# Altium PCB PCB1.PcbDoc
Units mm, origin at the board's own origin, x right, y up, seen from the top; angles counter-clockwise.
Board outline 145.8 x 123.7 mm, 2 copper layers (Top Layer, Bottom Layer); 35 components, 39 nets, 130 pads, 24 vias.
Unrouted connection lines stored in the file: 28.
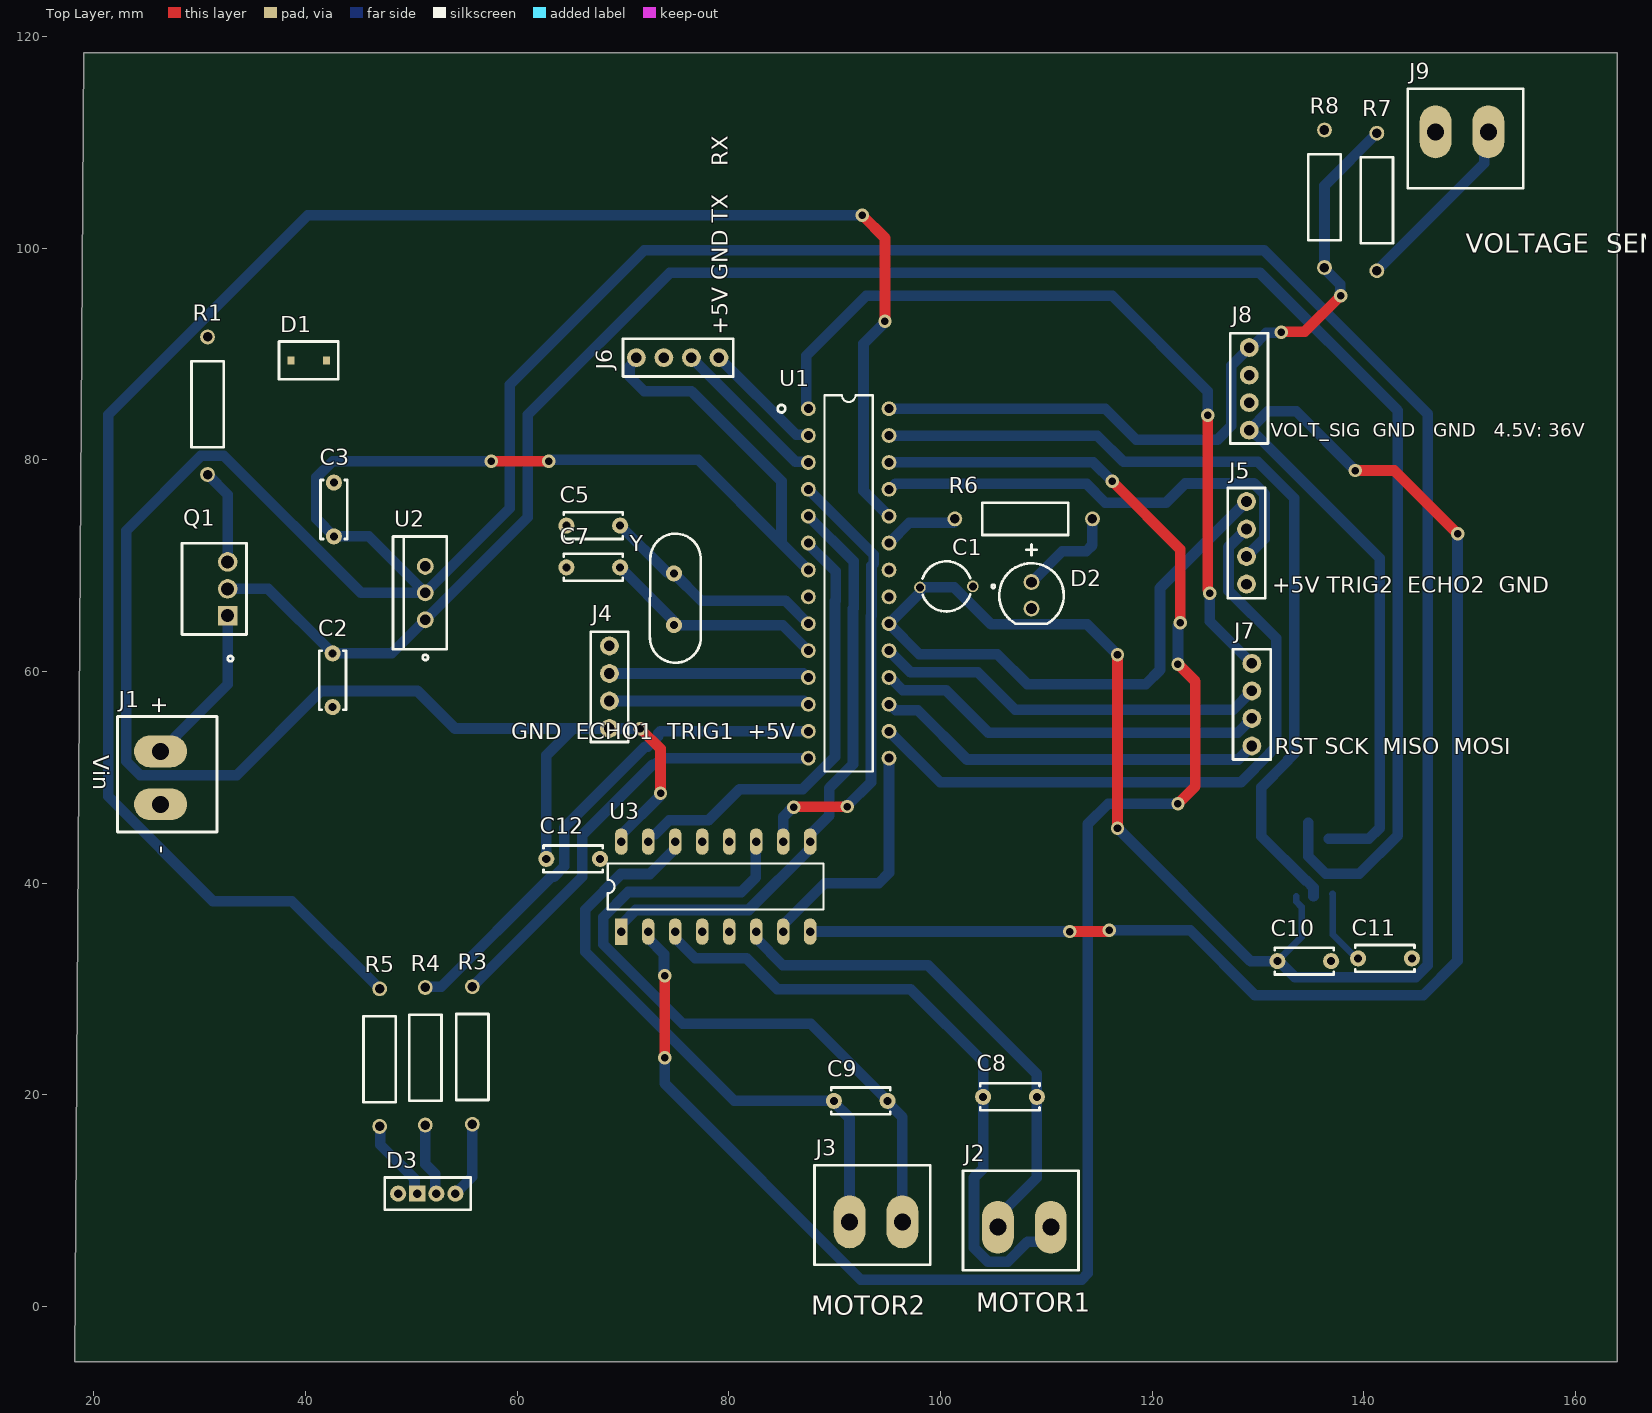
[diagram p0: Top Layer view]
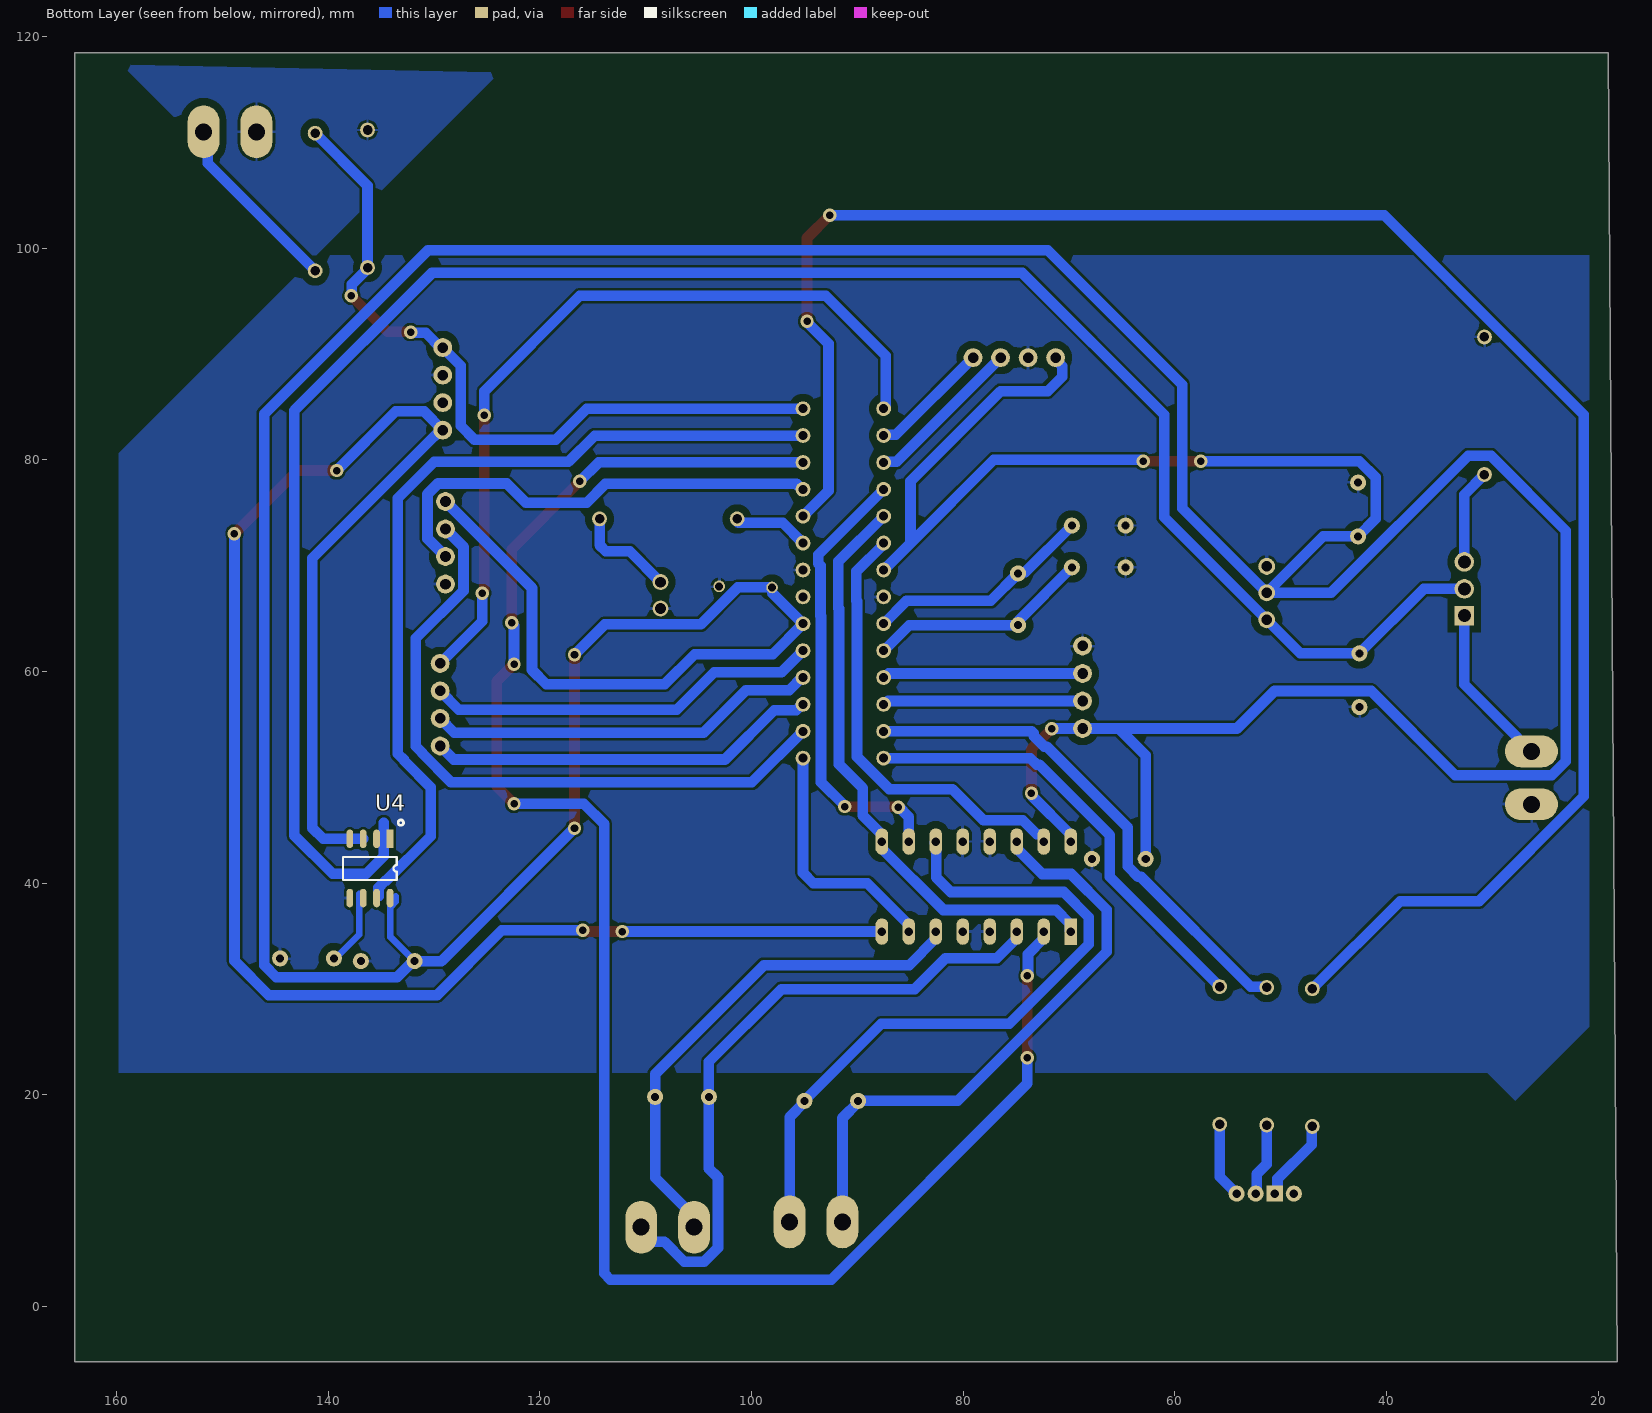
[diagram p1: Bottom Layer view, seen from below]
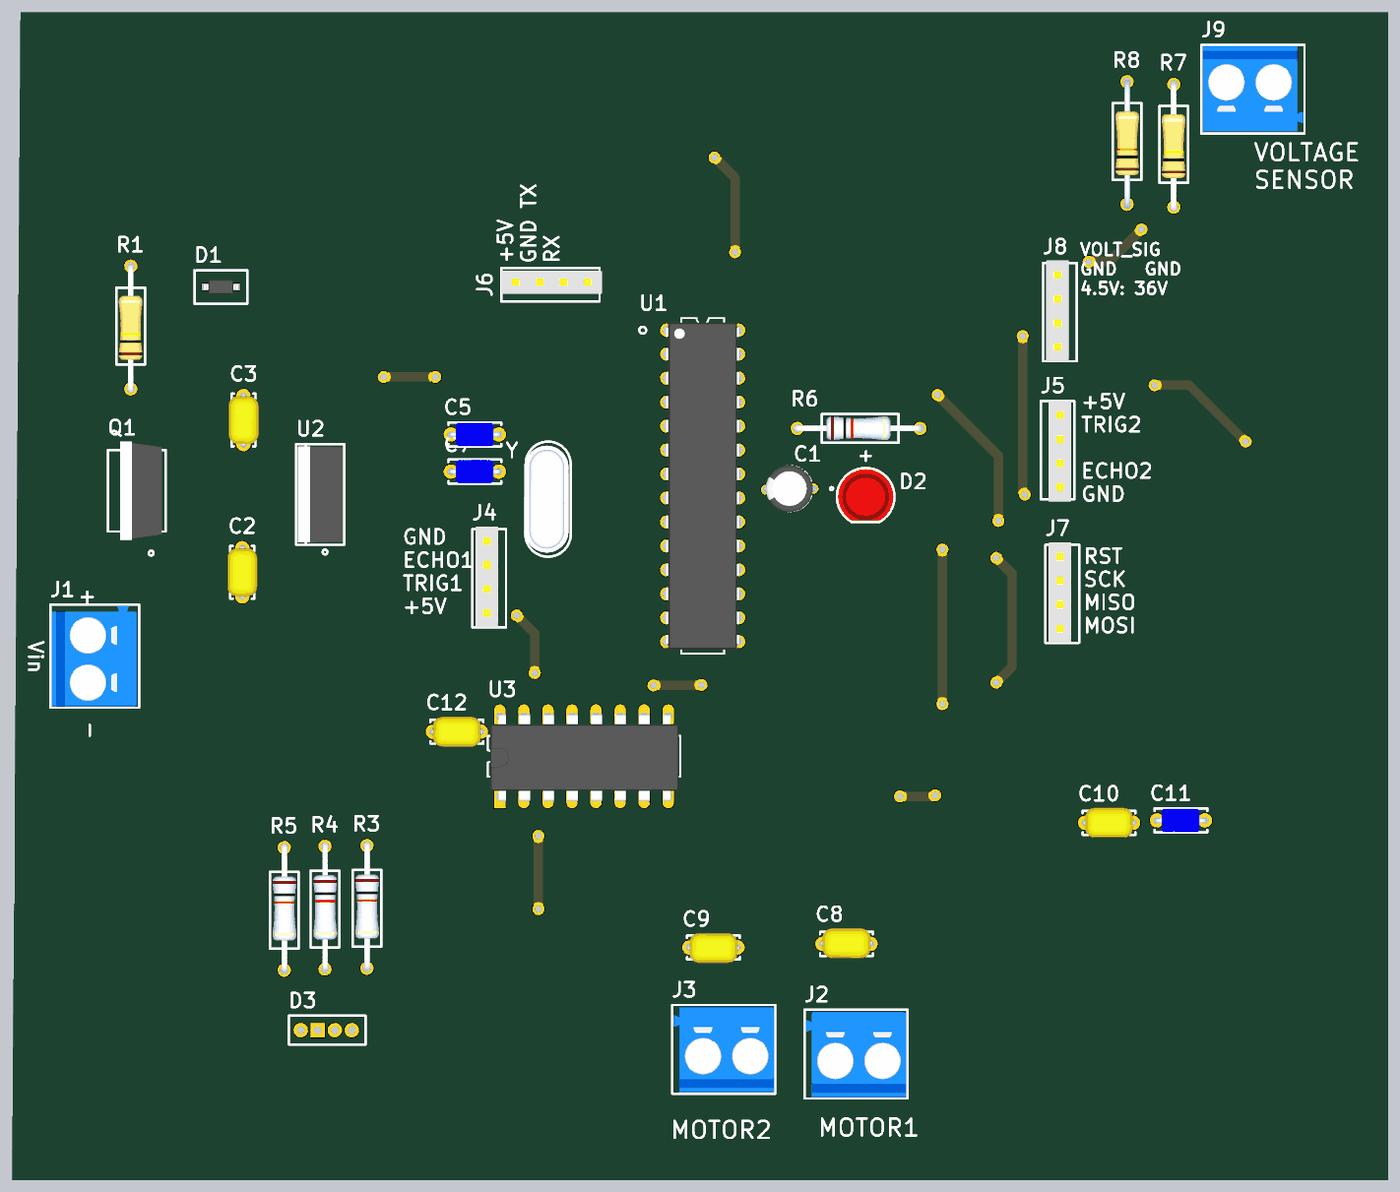
[diagram p2: 3D render of the assembled board from above, using the file's embedded part models]

## Layer stack, top to bottom
Top Solder: solder mask 0.0102, Solder Resist, Dk 3.5
Top Layer: signal copper 0.0356
Dielectric 1: dielectric 0.32, FR-4, Dk 4.8
Bottom Layer: signal copper 0.0356
Bottom Solder: solder mask 0.0102, Solder Resist, Dk 3.5

## Board outline
18.161,-5.207 19.05,118.491 163.957,118.491 163.957,-5.207

## Design rules (kind name [scope] priority, off if disabled: settings)
Clearance [All] p1: gap=0.254 ignorepadtopadclearanceinfootprint=FALSE except(0.7: Arc-Arc Arc-Track Track-Track THPad-Fill THPad-Poly THPad-Region)
PolygonConnect [All] p1: connectstyle=Relief reliefconductorwidth=0.254 reliefentries=4 polygonreliefangle="90 Angle" airgapwidth=0.254
RoutingVias [All] p1: holewidth=0.711 width=1.27 viastyle="Through Hole" minholewidth=0.711 minwidth=1.27 maxholewidth=0.711 maxwidth=1.27
SolderMaskExpansion [All] p1: expansion=0.102 istentingtop=FALSE
SupplyNets "Schematic Supply Nets_5" [InNet('Vin')] p1: voltage=0.000
SupplyNets "Schematic Supply Nets_4" [InNet('VCC')] p2: voltage=0.000
SupplyNets "Schematic Supply Nets_3" [InNet('+4.5V : 36V')] p3: voltage=0.000
SupplyNets "Schematic Supply Nets_2" [InNet('+5V')] p4: voltage=0.000
SupplyNets "Schematic Supply Nets" [InNet('GND')] p5: voltage=0.000
Width [All] p1: maxlimit=1.27 minlimit=0.635 preferedwidth=1 minimp=50.000000 maximp=50.000000 favimp=50.000000
30 further rules are at their usual default settings.

## Components (designator, comment, footprint, x,y, rotation, side; value= is the part's Value field where it differs from the comment)
C1 "CAP 10uF" "Cap 10uF" 103.044,68.047 r180 top
C2 "Cap 0.1uF" "CAP 0.1uF" 42.545,56.642 r90 top
C3 "Cap 0.1uF" "CAP 0.1uF" 42.672,77.851 r270 top
C5 "CAP 22pF" "Cap 22pF" 64.643,73.787 r0 top
C7 "CAP 22pF" "Cap 22pF" 64.643,69.85 r0 top
C8 "CAP 30pF" "CAP 30pF" 109.093,19.812 r180 top
C9 "CAP 30pF" "CAP 30pF" 89.916,19.431 r0 top
C10 "Cap 0.1uF" "CAP 0.1uF" 136.906,32.639 r180 top
C11 "CAP 1nF" "CAP 1nF" 144.526,32.893 r180 top
C12 "Cap 0.1uF" "CAP 0.1uF" 67.818,42.291 r180 top
D1 "1N5819 SMD Diode" "1N5819 SMD Diode" 38.608,89.408 r0 top
D2 "LED" LED 108.585,68.453 r270 top
D3 "RGB LED" "RGB LED" 48.746,10.668 r0 top
J1 "TerminalBlock 2pin" "Terminal Block 2pin" 17.145,51.689 r270 top
J2 "TerminalBlock 2pin" "Terminal Block 2pin" 106.172,-1.651 r0 top
J3 "TerminalBlock 2pin" "Terminal Block 2pin" 92.155,-1.143 r0 top
J4 "Headers 4pin" "Header 4pin" 68.707,54.592 r90 top
J5 "Headers 4pin" "Header 4pin" 128.905,76.091 r270 top
J6 "Headers 4pin" "Header 4pin" 71.229,89.662 r0 top
J7 "Headers 4pin" "Header 4pin" 129.413,52.941 r90 top
J8 "VOLTAGE SENSOR" "Header 4pin" 129.159,82.786 r90 top
J9 "TerminalBlock 2pin" "Terminal Block 2pin" 151.003,120.142 r180 top
Q1 "IRF5305 P-MOSFET" IRF5305 32.766,65.278 r90 top
R1 "RES 100K" Res100K 30.734,91.613 r270 top
R3 "RES 1K" "Res 1K" 55.753,17.226 r90 top
R4 "RES 1K" "Res 1K" 51.308,17.145 r90 top
R5 "RES 1K" "Res 1K" 46.99,17.018 r90 top
R6 "RES 1K" "Res 1K" 114.346,74.422 r180 top
R7 "RES 30K" Res100K 141.224,110.871 r270 top
R8 "RES 10K" Res10K 136.271,111.171 r270 top
U1 "Atmega328p" "ATMega 328 P-PU - duplicate" 87.503,51.816 r0 top
U2 "LM7805" LM7805 51.308,64.887 r90 top
U3 "L293D" L293D 72.36,38.227 r90 top
U4 "CURRENT_SEN ACS712" Cuurent_sens 134.139,44.196 r270 bottom
Y "Crystal oscillator" "Crrystal 16MHZ" 74.803,64.389 r90 top

## Footprints (in the part's own frame and the unit in brackets; to place one, negate y for a bottom-side part, rotate by r counter-clockwise, add the part's x,y. Pads: shape width x height; smd on the part's side, far side on the other; paste and mask are expansions set on the pad)
"1N5819 SMD Diode" [mm]
  rect 0.65x0.75 smd: A(0,0) K(3.35,0)
  silkscreen extent -1.12,-1.78 4.47,1.78, body extent -0.15,-0.77 3.5,0.77, height 1.5
"ATMega 328 P-PU - duplicate" [mm]
  round 1.4 hole 0.85: 1(0,33.02) 2(0,30.48) 3(0,27.94) 4(0,25.4) 5(0,22.86) 6(0,20.32) 7(0,17.78) 8(0,15.24) 9(0,12.7) 10(0,10.16) 11(0,7.62) 12(0,5.08) 13(0,2.54) 14(0,0) 15(7.62,0) 16(7.62,2.54) 17(7.62,5.08) 18(7.62,7.62) 19(7.62,10.16) 20(7.62,12.7) 21(7.62,15.24) 22(7.62,17.78) 23(7.62,20.32) 24(7.62,22.86) 25(7.62,25.4) 26(7.62,27.94) 27(7.62,30.48) 28(7.62,33.02)
  silkscreen extent -2.9,-1.27 6.09,34.29, body extent -0.14,-0.83 7.76,33.85, height 4.57
"CAP 0.1uF" [mil]
  round 60 hole 30: 1(0,0) 2(200,0)
  silkscreen extent -10,-50 210,50, body extent -10,-62 210,63, height 231
"CAP 1nF" [mil]
  round 60 hole 30: 1(0,0) 2(200,0)
  silkscreen extent -10,-50 210,50, body extent -7,-48 210,50, height 217
"Cap 10uF" [mm]
  round 1.1 hole 0.75: 1(0,0) 2(5,0.102)
  silkscreen extent -2.08,-2.37 4.75,2.37, body extent -0.21,-2.5 5.29,2.5, height 12.5
"Cap 22pF" [mil]
  round 60 hole 30: 1(0,0) 2(200,0)
  silkscreen extent -10,-50 210,50, body extent -8,-49 208,49, height 217
"CAP 30pF" [mil]
  round 60 hole 30: 1(0,0) 2(200,0)
  silkscreen extent -10,-50 210,50, body extent -10,-65 210,60, height 231
"Crrystal 16MHZ" [mil]
  round 60 hole 28.74: 1(0,0) 2(192.13,0)
  silkscreen extent -140,-100 340,90, body extent -123,-92 323,92, height 256
Cuurent_sens [mm]
  rect 1.75x0.65 smd: 1(0,0)
  oval 1.75x0.65 smd: 2(0,-1.27) 3(0,-2.54) 4(0,-3.81) 5(5.6,-3.81) 6(5.6,-2.54) 7(5.6,-1.27) 8(5.6,0)
  silkscreen extent -1.78,-4.45 3.89,1.27, body extent -0.21,-4.48 5.79,0.42, height 1.75
"Header 4pin" [mil]
  round 70 hole 39.37: 1(1,0) 2(103.36,0) 3(205.72,0) 4(308.09,0)
  silkscreen extent -49,-70 361,70, body extent -49,-38 371,58, height 335
IRF5305 [mm]
  rect 1.845x1.845 hole 1.23: 1(0,0.127)
  round 1.845 hole 1.23: 2(2.54,0.127) 3(5.08,0.127)
  silkscreen extent -4.32,-1.65 6.86,4.45, body extent -2.67,-1.27 7.75,3.18, height 19.3
L293D [mm]
  rect 2.5x1.2 hole 0.8: 1(-2.794,2.54)
  oval 2.5x1.2 hole 0.8: 2(-2.794,-0.01) 3(-2.794,-2.56) 4(-2.794,-5.11) 5(-2.794,-7.66) 6(-2.794,-10.21) 7(-2.794,-12.76) 8(-2.794,-15.31) 9(5.706,-15.31) 10(5.706,-12.76) 11(5.706,-10.21) 12(5.706,-7.66) 13(5.706,-5.11) 14(5.706,-2.56) 15(5.706,-0.01) 16(5.706,2.54)
  silkscreen extent -0.71,-16.58 3.62,3.81, body extent -3.3,-16.44 5.94,3.56, height 5.1
LED [mm]
  round 1.5 hole 1: 1(0,0) 2(2.5,0)
  silkscreen extent -3.56,-3.05 3.95,3.05, body extent -1.66,-2.95 3.77,2.95, height 10.6
LM7805 [mm]
  round 1.6 hole 1: 1(0,0) 2(2.55,0) 3(5.05,0)
  silkscreen extent -3.81,-2.03 7.87,3.05, body extent -2.54,-1.84 7.62,2.86, height 19.81
Res10K [mm]
  round 1.4 hole 0.9: 1(0,0) 2(13,0)
  silkscreen extent 2.29,-1.52 10.41,1.52, body extent -0.2,-1.23 13.4,1.27, height 4.04
Res100K [mm]
  round 1.4 hole 0.9: 1(0,0) 2(13,0)
  silkscreen extent 2.29,-1.52 10.41,1.52, body extent -0.2,-1.27 13.4,1.23, height 4.04
"Res 1K" [mm]
  round 1.4 hole 0.9: 1(0,0) 2(13,0)
  silkscreen extent 2.29,-1.52 10.41,1.52, body extent -0.2,-1.27 13.4,1.23, height 4.04
"RGB LED" [mil]
  round 60 hole 31.5: 1(0,0) 3(141.73,0) 4(212.6,0)
  rect 60x60 hole 31.5: 2(70.87,0)
  silkscreen extent -50,-60 270,60
"Terminal Block 2pin" [mm]
  oval 3x5 hole 1.6: 1(-0.762,9.144) 2(4.238,9.144)
  silkscreen extent -4.06,5.08 6.86,14.48, body extent -3.9,5.22 6.7,14.22, height 12.6

## Part data
J8: library part "Headers 4pin"
R7: library part "RES 100K"
U4: library part "CURRENT_MOD ACS712"

## Via types
v1: diameter 1.27, hole 0.711, Top Layer to Bottom Layer, 24 vias

## Nets (pads, with @x,y where several pads share a name; then routed paths per layer and width w, separated by ;. In a path a pad name is that pad's centre, name@x,y a point inside that pad or via, vN(x,y) a via of type N, cw(c..) or ccw(c..) an arc to the next point about the centre after c; other vN are vias at no path point)
"+4.5V : 36V": J8.1 U3.8 U4.3 U4.4 | length 178.7
  Top Layer w1: v1(112.219,35.433) 115.751,35.433 115.878,35.56 v1(115.951,35.56) ; v1(139.192,78.994) 142.875,78.994 v1(148.844,73.025)
  Bottom Layer w1: U3.8 v1(112.219,35.433) ; v1(115.951,35.56) 123.571,35.56 129.708,29.423 145.604,29.423 148.844,32.663 v1(148.844,73.025) ; U4.3 U4.4 140.462,44.196 141.478,45.212 141.478,70.705 130.664,81.519 130.661,81.519 129.37,82.811 J8.1 130.93,84.582 133.604,84.582 v1(139.192,78.994)
+5V: C1.2 C3.2 C10.2 C12.2 J4.1 J5.1 J6.1 U1.7 U1.20 U2.2 U3.16 U4.8 | length 539.6
  Top Layer w1: v1(57.531,79.883) v1(62.992,79.883) ; v1(71.628,54.61) 73.533,52.705 v1(73.533,48.514) ; v1(116.713,45.212) v1(116.713,61.595)
  Bottom Layer w0.635: C10.2 134.112,34.925 134.112,37.747 133.604,38.255 133.604,38.735
  Bottom Layer w1: v1(57.531,79.883) 42.56,79.883 41.021,78.344 41.021,74.422 C3.2 45.974,72.771 U2.2 ; C12.2 62.738,52.07 65.285,54.617 ; v1(62.992,79.883) 63.119,79.883 63.246,80.01 77.089,80.01 84.963,72.136 ; U3.16 69.82,44.583 73.481,48.244 73.481,48.462 v1(73.533,48.514) ; J6.1 71.254,89.451 70.637,88.835 70.637,87.859 72.009,86.487 76.454,86.487 84.963,77.978 84.963,72.136 ; v1(71.628,54.61) 71.624,54.614 68.711,54.614 J4.1 65.285,54.617 ; U1.7 84.963,72.136 ; C1.2@98.025,67.418 U1.20 97.995,61.644 105.361,61.644 108.204,58.801 119.38,58.801 120.728,60.149 120.728,67.889 J5.1 ; C1.2 101.301,67.945 104.797,64.449 113.859,64.449 v1(116.713,61.595) ; v1(116.713,45.212) 129.286,32.639 C10.2 131.968,32.639 133.484,31.123 144.9,31.123 146.042,32.265 146.042,84.336 130.556,99.822 72.009,99.822 59.295,87.108 59.295,75.424 U2.2 ; U2.2 45.231,67.437 32.279,80.39 30.106,80.39 23.035,73.318 23.035,51.517 24.355,50.197 33.482,50.197 41.443,58.158 50.57,58.158 54.111,54.617 65.285,54.617
BLUE: R3.2 U1.14 | length 43
  Bottom Layer w1: R3.2 66.138,40.611 66.138,44.548 72.8,51.21 73.036,51.21 73.642,51.816 U1.14
CUR_SIG: U1.27 U4.7 | length 81.7
  Bottom Layer w1: U1.27 114.808,82.296 117.285,79.819 129.96,79.819 133.399,76.38 133.399,52.224 132.813,51.638 132.813,51.558 130.302,49.047 130.302,44.45 134.527,40.225 134.586,40.225 135.234,39.577 U4.7@135.234,38.771
ECHO1: J4.3 U1.11 | length 19
  Bottom Layer w1: J4.3 87.014,59.817 87.395,59.436 U1.11
ECHO2: J5.3 U1.25 | length 44.2
  Bottom Layer w1: U1.25 95.231,77.216 95.739,77.724 113.792,77.724 115.57,75.946 121.294,75.946 123.114,77.766 129.609,77.766 130.605,76.77 130.605,72.566 J5.3
EN: U1.5 U3.1 U3.9 | length 56.3
  Bottom Layer w1: U3.1 69.92,35.533 69.92,36.183 71.202,37.465 81.852,37.465 87.67,43.283 87.67,44.529 87.735,44.594 87.735,44.648 89.486,46.399 89.486,48.991 91.723,51.228 91.723,65.924 91.772,65.973 91.772,70.407 U1.5
GND: C1.1 C2.1 C3.1 C5.1 C7.1 C10.1 C11.1 C12.1 D2.2 D3.1 J1.2 J4.4 J5.4 J6.2 J8.2 J8.3 J9.2 R1.1 R8.1 U1.8 U1.22 U2.3 U3.4 U3.5 U3.12 U3.13 U4.5
GREEN: R4.2 U1.13 | length 48.5
  Bottom Layer w1: R4.2 51.385,30.222 52.812,30.222 63.182,40.591 63.442,40.591 64.438,41.587 64.438,45.261 72.087,52.91 72.332,52.91 73.328,53.906 73.328,54.151 73.533,54.356 U1.13
IN1: U1.26 U3.2 | length 171.1
  Top Layer w1: v1(73.914,23.495) v1(73.914,31.242) ; v1(116.205,77.978) 122.648,71.535 v1(122.648,64.618) ; v1(122.428,47.498) 124.079,49.149 124.079,59.055 v1(122.428,60.706)
  Bottom Layer w1: U3.2 72.37,34.783 73.862,33.291 73.862,31.294 v1(73.914,31.242) ; v1(73.914,23.495) 73.914,21.082 92.456,2.54 103.771,2.54 103.772,2.539 107.048,2.539 107.049,2.54 113.333,2.54 113.919,3.126 113.919,45.593 115.824,47.498 v1(122.428,47.498) ; U1.26 114.427,79.756 v1(116.205,77.978) ; v1(122.428,60.706) 122.428,64.325 122.648,64.545 v1(122.648,64.618)
IN2: U1.15 U3.7 | length 23.5
  Bottom Layer w1: U3.7 85.12,36.083 89.042,40.005 94.156,40.005 95.123,40.972 U1.15
IN3: U1.4 U3.10 | length 42.4
  Top Layer w1: v1(86.106,47.195) 86.131,47.219 91.161,47.219 v1(91.186,47.244)
  Bottom Layer w1: U3.10 85.12,46.258 86.057,47.195 v1(86.106,47.195) ; U1.4 93.681,71.038 93.681,70.21 93.472,70.001 93.472,65.269 93.423,65.22 93.423,49.554 91.186,47.317 v1(91.186,47.244)
IN4: U1.6 U3.15 | length 42.6
  Bottom Layer w1: U3.15 72.37,44.529 72.462,44.621 73.043,44.621 74.359,45.937 78.068,45.937 81.026,48.895 86.986,48.895 90.023,51.932 90.023,66.628 90.072,66.677 90.072,69.459 87.503,72.028 U1.6
LED_ind: R6.2 U1.23 | length 7.3
  Bottom Layer w1: U1.23 97.028,74.041 101.219,74.041 101.346,74.168 R6.2
MISO: J7.2 U1.18 | length 37
  Bottom Layer w1: U1.18 95.231,59.436 96.423,58.244 100.506,58.244 104.521,54.229 128.076,54.229 J7.2
MOSI: J7.1 U1.17 | length 37
  Bottom Layer w1: U1.17 95.231,56.896 95.772,56.355 97.823,56.355 102.489,51.689 128.136,51.689 J7.1
NetC5_2: C5.2 U1.9 Y.2 | length 20.9
  Bottom Layer w1: C5.2 Y.2@74.141,69.369 ; Y.2 77.397,66.675 85.344,66.675 U1.9
NetC7_2: C7.2 U1.10 Y.1 | length 21.3
  Bottom Layer w1: C7.2 74.703,64.87 74.703,64.489 Y.1 85.09,64.389 U1.10
NetC11_2: C11.2 U4.6 | length 7.2
  Bottom Layer w0.635: 137.033,38.989 137.052,38.97 137.052,35.16 139.319,32.893 C11.2
NetD1_1: Q1.3 R1.2 | length 9.2
  Bottom Layer w1: R1.2@30.811,78.69 R1.2 32.639,76.708 Q1.3
NetD2_1: D2.1 R6.1 | length 9.7
  Bottom Layer w1: D2.1 111.506,71.374 113.76,71.374 114.346,71.96 R6.1
NetD3_2: D3.2 R5.1 | length 7.8
  Bottom Layer w1: R5.1 47.067,16.941 47.067,15.299 50.284,12.082 50.284,10.93 D3.2
NetD3_3: D3.3 R4.1 | length 6.9
  Bottom Layer w1: R4.1 51.308,13.462 52.246,12.524 52.246,10.768 D3.3
NetD3_4: D3.4 R3.1 | length 7.2
  Bottom Layer w1: D3.4 55.753,12.275 R3.1
NetJ9_1: J9.1 R7.2 | length 17.5
  Bottom Layer w1: R7.2 151.382,108.029 151.382,110.615 J9.1
OUT1: C8.2 J2.2 U3.3 | length 61.9
  Bottom Layer w1: U3.3 74.92,34.783 76.81,32.893 81.661,32.893 84.582,29.972 97.155,29.972 104.013,23.114 C8.2 104.013,13.043 103.156,12.186 103.156,5.559 104.476,4.239 106.344,4.239 108.215,6.11 109.486,6.11 110.41,7.034 J2.2
OUT2: C8.1 J2.1 U3.6 | length 48.5
  Bottom Layer w1: U3.6 82.57,34.783 85.095,32.258 98.806,32.258 109.093,21.971 C8.1 109.093,12.176 105.41,8.493 J2.1
OUT3: C9.2 J3.2 U3.11 | length 67
  Bottom Layer w1: U3.11 82.57,43.922 82.677,43.815 82.55,43.688 82.55,40.567 81.148,39.165 70.498,39.165 68.12,36.787 68.12,34.217 75.636,26.701 87.726,26.701 C9.2 94.996,19.289 96.393,17.892 J3.2
OUT4: C9.1 J3.1 U3.14 | length 56.9
  Bottom Layer w1: U3.14 74.92,43.283 72.502,40.865 69.794,40.865 66.42,37.491 66.42,33.513 80.502,19.431 C9.1 89.916,19.289 91.393,17.812 J3.1
RED: R5.2 U1.24 | length 179.5
  Top Layer w1: v1(92.583,103.124) 94.742,100.965 v1(94.742,93.091)
  Bottom Layer w1: R5.2 38.702,38.306 31.246,38.306 21.335,48.217 21.335,84.27 40.189,103.124 v1(92.583,103.124) ; v1(94.742,93.091) 94.742,93.018 92.71,90.986 92.71,77.089 U1.24
Reset: J7.4 U1.1 | length 76.6
  Top Layer w1: v1(125.222,84.201) 125.222,67.705 125.442,67.485 v1(125.442,67.412)
  Bottom Layer w1: U1.1 87.503,84.944 87.29,85.157 87.29,89.83 92.964,95.504 116.205,95.504 125.222,86.487 v1(125.222,84.201) ; v1(125.442,67.412) 125.442,64.737 J7.4
RX: J6.4 U1.2 | length 11.5
  Bottom Layer w1: J6.4 86.343,82.373 87.426,82.373 U1.2
SCK: J7.3 U1.19 | length 37.3
  Bottom Layer w1: U1.19 97.155,59.944 103.505,59.944 107.061,56.388 127.635,56.388 J7.3
TRIG1: J4.2 U1.12 | length 18.9
  Bottom Layer w1: J4.2 87.074,57.217 87.395,56.896 U1.12
TRIG2: J5.2 U1.16 | length 63.1
  Bottom Layer w1: U1.16 99.949,49.53 128.381,49.53 131.113,52.262 131.113,52.342 131.699,52.928 131.699,63.148 127.205,67.642 127.205,71.766 J5.2
TX: J6.3 U1.3 | length 15.2
  Bottom Layer w1: J6.3 86.283,79.833 87.426,79.833 U1.3
VCC: C2.2 Q1.2 U2.1 U4.1 U4.2 | length 193
  Bottom Layer w1: Q1.2 36.449,67.818 C2.2 48.143,61.722 U2.1 60.995,74.574 60.995,84.266 74.391,97.663 130.175,97.663 143.178,84.66 143.178,44.508 139.564,40.894 136.398,40.894 134.747,42.545 134.747,45.72
Vin: J1.1 Q1.1 | length 15.7
  Bottom Layer w1: J1.1 26.748,52.451 27.672,53.375 27.672,53.834 32.639,58.801 Q1.1
VOLT_SIG: J8.4 R7.1 R8.2 U1.28 | length 70.9
  Top Layer w1: v1(132.207,92.075) 132.256,92.124 134.415,92.124 v1(137.795,95.504)
  Bottom Layer w1: U1.28 115.57,84.836 118.491,81.915 126.16,81.915 127.459,83.214 127.459,88.911 J8.4 129.37,90.611 130.782,92.023 132.155,92.023 v1(132.207,92.075) ; v1(137.795,95.504) 137.743,95.556 137.743,96.59 136.271,98.063 R8.2 136.271,105.918 R7.1
pads on no net: D1.A D1.K U1.21

## Polygon pours and split planes (outlines as drawn)
GND on Bottom Layer "GND_L02_P000" (solid, pour order 0): 159.512,117.348 141.478,99.314 20.828,99.314 20.828,26.416 27.813,19.431 30.48,22.098 159.766,22.098 159.766,80.645 123.825,116.586

## Silkscreen, mask and mechanical layers (free items; w line width, h text height)
Top Overlay:
  text "VOLTAGE  SENSOR" at 149.606,99.568 h1.8
  text "+5V GND TX    RX" at 79.883,91.821 h1.52 r90
  text "VOLT_SIG  GND   GND   4.5V: 36V" at 131.191,82.169 h1.28
  text "+5V TRIG2  ECHO2  GND" at 131.318,67.437 h1.52
  text "+" at 25.527,57.658 h1.52 r270
  text "GND  ECHO1  TRIG1  +5V" at 59.436,53.594 h1.52
  text "RST SCK  MISO  MOSI" at 131.572,52.197 h1.52
  text "Vin" at 19.939,52.07 h1.52 r270
  text "-" at 25.781,43.561 h1.52 r270
  text "MOTOR1" at 103.378,-0.508 h1.8
  text "MOTOR2" at 87.757,-0.762 h1.8
Mechanical 1:
  the board outline again, w0.254

## Dimensions
18.161,-5.207 to 164.211,-7.874 on Bottom Layer
18.161,-5.207 to 15.887,118.396 on Bottom Layer